# EAGLE board Laboratory 3_ I2C Communication_ Part 1 – Generate Random Numbers and Print them to the Serial Monitor (EAGLE 9.7.0)

Size 139.29 x 120.45 mm. Coordinates in mm from the lower left corner, seen from the top.
Outline: 0,0 139.29,0 139.29,120.45 0,120.45 0,0
Copper layers (1*16): Top 0.035mm / dielectric 1.5mm / Bottom 0.035mm
Design rules "default": minimum track width 6mil, minimum drill 0.35mm, track to track 6mil, track to pad 6mil, pad to pad 6mil, via to via 6mil, smd to smd 6mil, copper to edge 40mil, drill to drill 6mil, minimum pad ring 10mil, minimum via ring 8mil, stop-mask expansion 4mil, vias tented up to drill 0mil, thermal gap 10mil

## Footprints (pad centres in the part's own frame; a part is rotated, then mirrored left to right if it is on the bottom)
RESAD1016W63L850D250B = drill 0.83 pad 1.43: 1 -5.08,0; 2 5.08,0
SWITCH-MOMENTARY-PTH-6.5MM = drill 1.016 pad 1.88: 1 -3.251,2.261; 2 3.251,2.261; 3 -3.251,-2.261; 4 3.251,-2.261
ARDUINO-UNO-R3-SHIELD = drill 1.016 pad 1.88: 3.3V 24.13,-2.54; 5V 24.13,0; A0 24.13,12.7; A1 24.13,15.24; A2 24.13,17.78; A3 24.13,20.32; A4 24.13,22.86; A5 24.13,25.4; AREF -24.13,-13.97; D2 -24.13,20.32; D3 -24.13,17.78; D4 -24.13,15.24; D5 -24.13,12.7; D6 -24.13,10.16; D7 -24.13,7.62; D8 -24.13,3.81; D9 -24.13,1.27; D10 -24.13,-1.27; D11 -24.13,-3.81; D12 -24.13,-6.35; D13 -24.13,-8.89; GND@0 24.13,2.54; GND@1 24.13,5.08; GND@2 -24.13,-11.43; IOREF 24.13,-7.62; NC 24.13,-10.16; RES 24.13,-5.08; RX -24.13,25.4; SCL -24.13,-19.05; SDA -24.13,-16.51; TX -24.13,22.86; VIN 24.13,7.62

## Placement (x,y rotation side)
R1  10k  [RESAD1016W63L850D250B]  132.96,39.59 90 top
S1  SWITCH_MOMENTARY  [SWITCH-MOMENTARY-PTH-6.5MM]  130.42,56.1 90 top
UMASTER_WRITER  ARDUINO-UNO-R3-SHIELD  [ARDUINO-UNO-R3-SHIELD]  47.88,90.61 270 top
USLAVE_RECIEVER  ARDUINO-UNO-R3-SHIELD  [ARDUINO-UNO-R3-SHIELD]  48.69,29.84 270 top

## Library data of the parts
R1 S1 UMASTER_WRITER USLAVE_RECIEVER = Tinkercad

## Nets
UMASTER_WRITER_5V: S1.1 S1.2 UMASTER_WRITER.5V
UMASTER_WRITER_D7: R1.2 S1.3 S1.4 UMASTER_WRITER.D7
UMASTER_WRITER_GND: R1.1 UMASTER_WRITER.GND@0 UMASTER_WRITER.GND@1 UMASTER_WRITER.GND@2 USLAVE_RECIEVER.GND@0 USLAVE_RECIEVER.GND@1 USLAVE_RECIEVER.GND@2
USLAVE_RECIEVER_A4: UMASTER_WRITER.A4 USLAVE_RECIEVER.A4
USLAVE_RECIEVER_A5: UMASTER_WRITER.A5 USLAVE_RECIEVER.A5

## Tracks (layer width: path | path; a pad name or v marks a point on that pad's centre or on a via)
UMASTER_WRITER_5V  (2 unrouted)
UMASTER_WRITER_D7  (3 unrouted)
UMASTER_WRITER_GND  (6 unrouted)
USLAVE_RECIEVER_A4  (1 unrouted)
USLAVE_RECIEVER_A5  (1 unrouted)